# Altium PCB sensores.PcbDoc
Units mm, origin at the board's own origin, x right, y up, seen from the top; angles counter-clockwise.
Board outline 120 x 53 mm, 2 copper layers (Top Layer, Bottom Layer); 22 components, 30 nets, 71 pads, 6 vias.
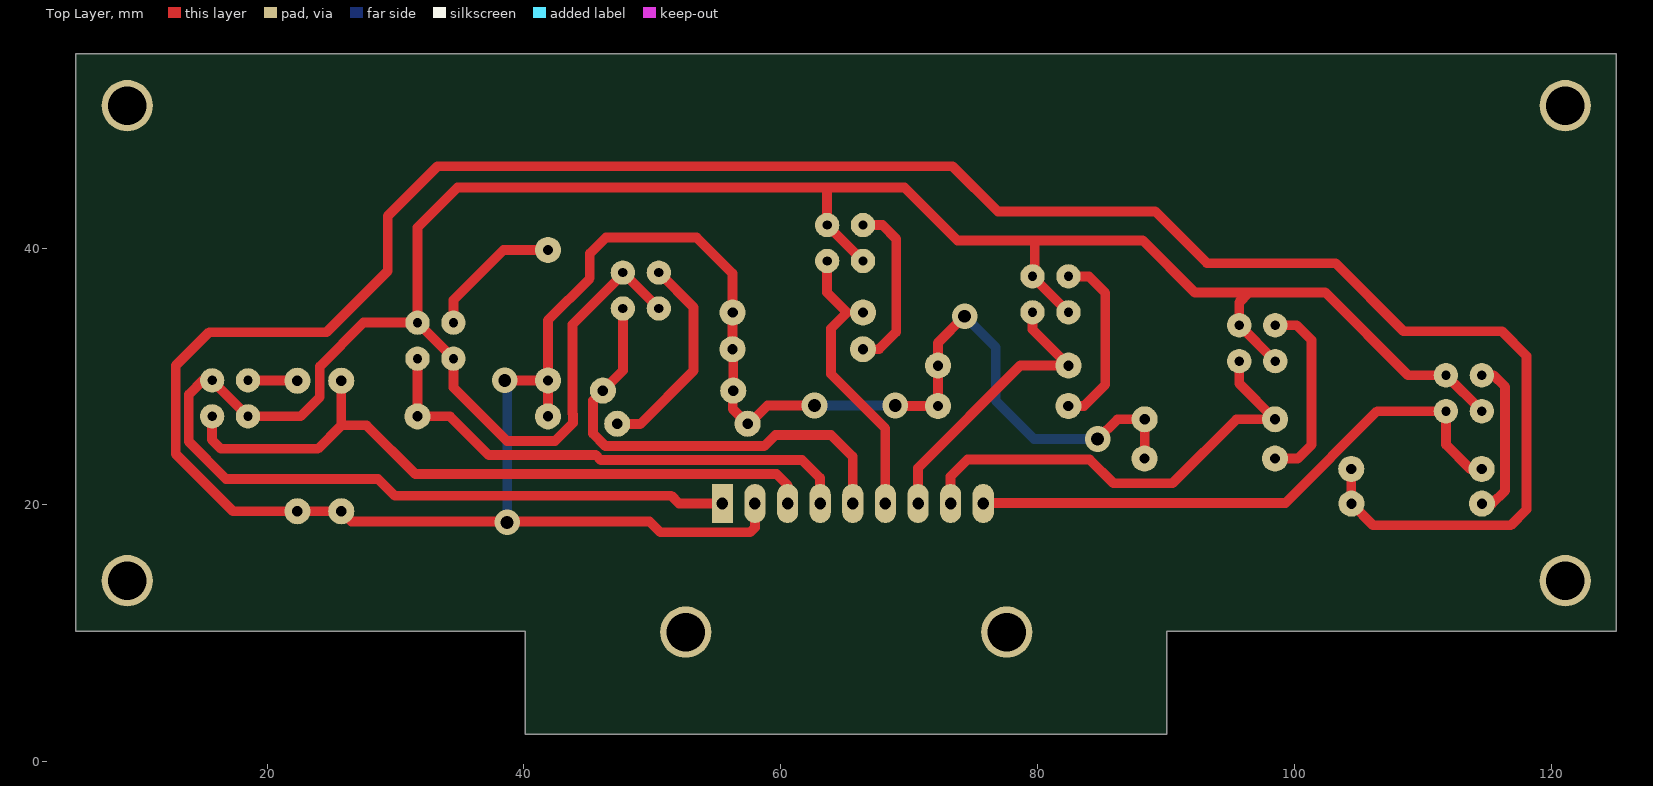
[diagram p0: Top Layer view]
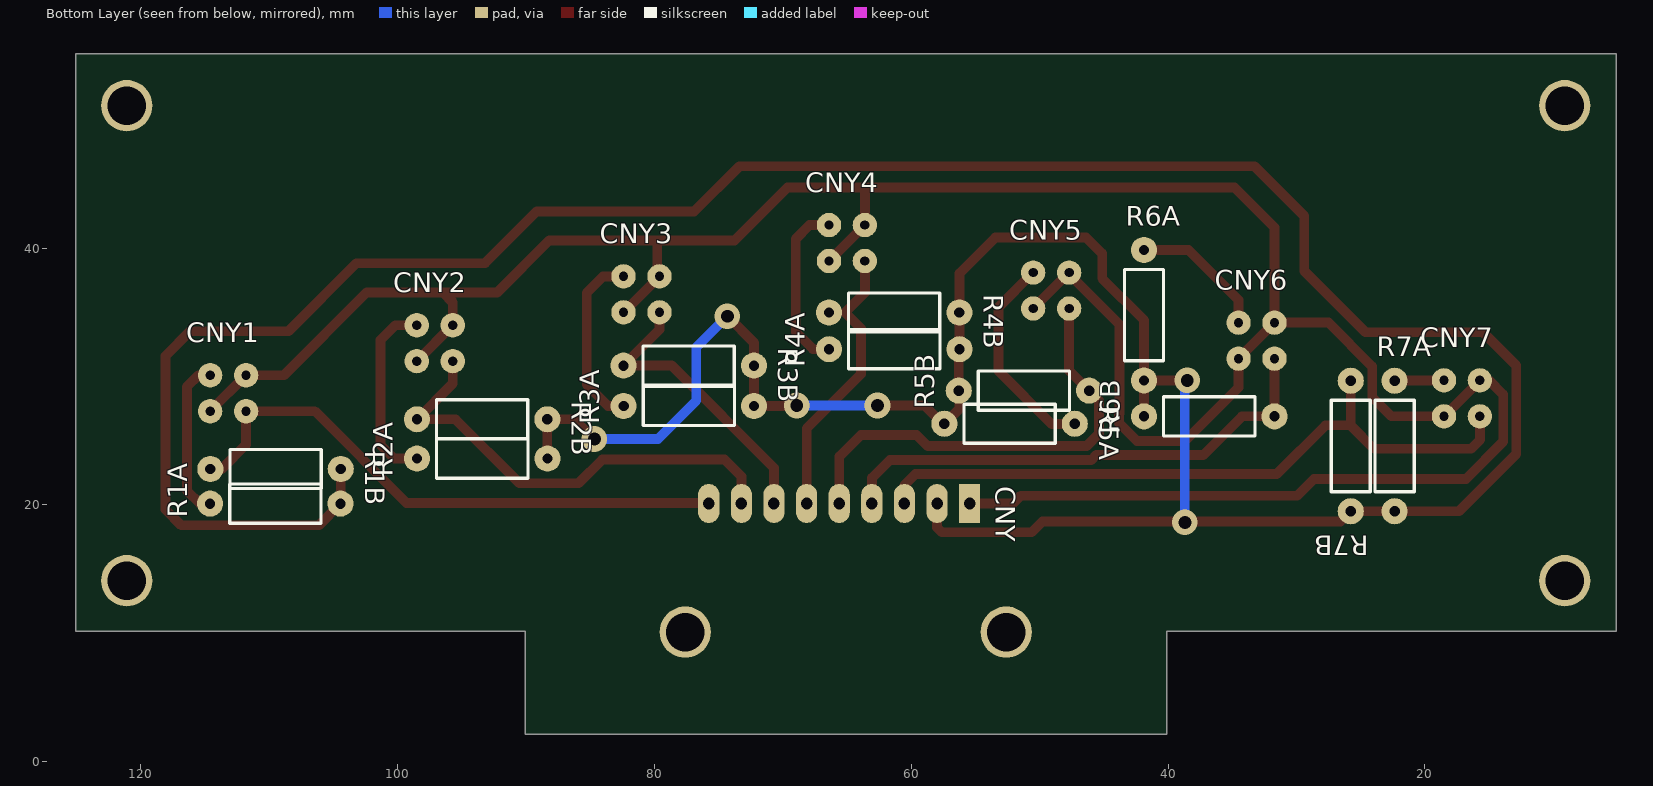
[diagram p1: Bottom Layer view, seen from below]
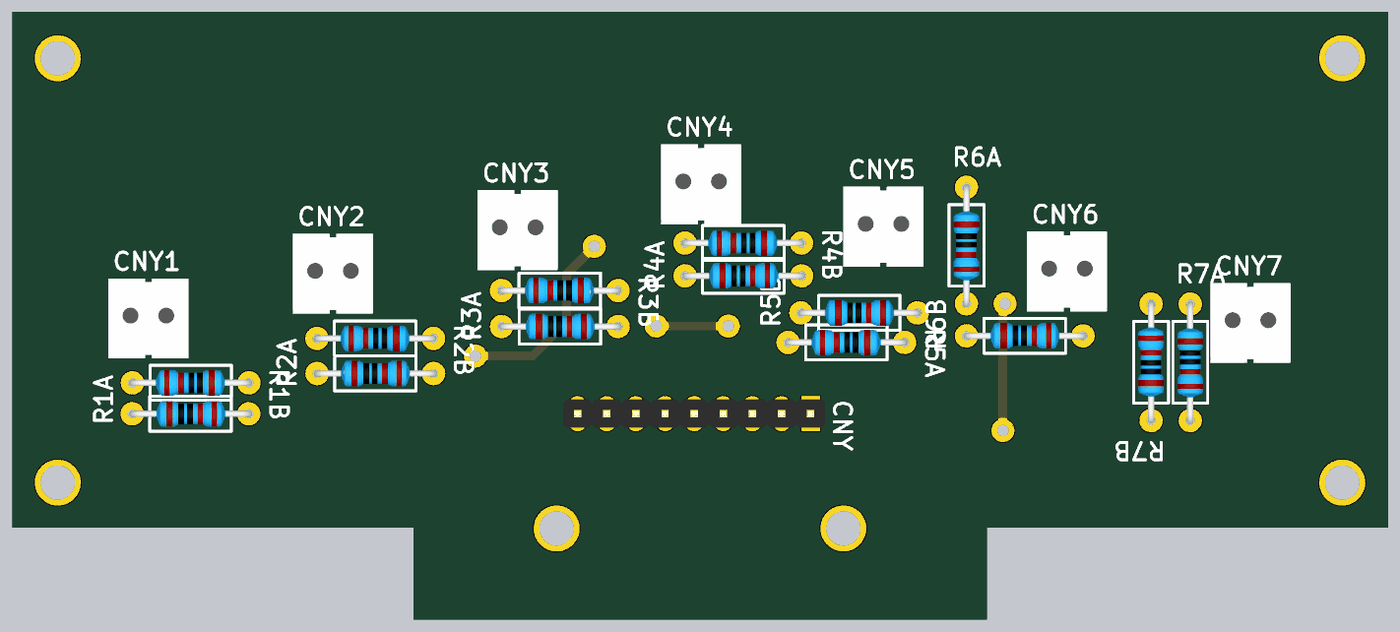
[diagram p2: 3D render of the assembled board from below, using the file's embedded part models]

## Layer stack, top to bottom
Top Solder: solder mask 0.0102, Solder Resist, Dk 3.5
Top Layer: signal copper 0.0356
Dielectric 1: dielectric 0.32, FR-4, Dk 4.8
Bottom Layer: signal copper 0.0356
Bottom Solder: solder mask 0.0102, Solder Resist, Dk 3.5

## Board outline
5.08,10.15 40.08,10.15 40.08,2.15 90.08,2.15 90.08,10.15 125.08,10.15 125.08,55.15 5.08,55.15

## Design rules (kind name [scope] priority, off if disabled: settings)
Clearance [All] p1: gap=0.254
PolygonConnect [All] p1: connectstyle=Relief reliefconductorwidth=0.254 reliefentries=4 polygonreliefangle="90 Angle" airgapwidth=0.254
RoutingVias [All] p1: holewidth=0.711 width=1.27 viastyle="Through Hole" minholewidth=0.711 minwidth=1.27 maxholewidth=0.711 maxwidth=1.27
SolderMaskExpansion [All] p1: expansion=0.102
Width [All] p1: maxlimit=0.762 minlimit=0.762 preferedwidth=0.762
30 further rules are at their usual default settings.

## Components (designator, comment, footprint, x,y, rotation, side; value= is the part's Value field where it differs from the comment)
CNY "" "HEADER 1x9" 55.45,20.11 r270 bottom
CNY1 "CNY70" CNY70 112.906,29.4 r180 bottom
CNY2 "CNY70" CNY70 96.806,33.3 r180 bottom
CNY3 "CNY70" CNY70 80.706,37.1 r180 bottom
CNY4 "CNY70" CNY70 64.706,41.1 r180 bottom
CNY5 "CNY70" CNY70 48.806,37.4 r180 bottom
CNY6 "CNY70" CNY70 32.806,33.5 r180 bottom
CNY7 "CNY70" CNY70 16.806,29 r180 bottom
R1A "" RES-Axial-400mil 104.446,20.1 r0 bottom
R1B "" RES-Axial-400mil 114.59,22.8 r180 bottom
R2A "" RES-Axial-400mil 88.33,23.61 r0 bottom
R2B "" RES-Axial-400mil 98.5,26.67 r180 bottom
R3A "" RES-Axial-400mil 72.24,27.71 r0 bottom
R3B "" RES-Axial-400mil 82.41,30.85 r180 bottom
R4A "" RES-Axial-400mil 56.24,32.13 r0 bottom
R4B "" RES-Axial-400mil 66.41,34.99 r180 bottom
R5A "" RES-Axial-400mil 57.42,26.32 r180 bottom
R5B "" RES-Axial-400mil 46.14,28.9 r0 bottom
R6A "" RES-Axial-400mil 41.87,29.7 r90 bottom
R6B "" RES-Axial-400mil 31.706,26.9 r0 bottom
R7A "" RES-Axial-400mil 22.35,19.51 r90 bottom
R7B "" RES-Axial-400mil 25.77,29.67 r270 bottom

## Footprints (in the part's own frame and the unit in brackets; to place one, negate y for a bottom-side part, rotate by r counter-clockwise, add the part's x,y. Pads: shape width x height; smd on the part's side, far side on the other; paste and mask are expansions set on the pad)
CNY70 [mm]
  round 1.9 hole 0.73: A(-1.7,0.7) C(1.1,-2.1) E(1.1,0.7) K(-1.7,-2.1)
  body extent -3.8,-4.47 3.2,2.5, height 6
"HEADER 1x9" [mil]
  rect 120x65 hole 35.43: 1(0,0)
  oval 120x65 hole 35.43: 2(0,-100) 3(0,-200) 4(0,-300) 5(0,-400) 6(0,-500) 7(0,-600) 8(0,-700) 9(0,-800)
  body extent -49,-850 49,50, height 336
RES-Axial-400mil [mil]
  round 80 hole 31.5: 1(0,0) 2(400,0)
  silkscreen extent 60,-60 340,60, body extent -12,-44 410,44, height 94

## Part data
CNY: library part "Header 1x9"
R1A R1B R2A R2B R3A R3B R4A R4B R5A R5B R6A R6B R7A R7B: library part RES

## Free pads (board coordinates)
  round 4 hole 3: 0(9.1,51.1) 1(121.1,51.1) 2(121.1,14.1) 3(9.1,14.1) 4(52.6,10.1) 5(77.6,10.1)

## Via types
v1: diameter 2, hole 1, Top Layer to Bottom Layer, 6 vias

## Nets (pads, with @x,y where several pads share a name; then routed paths per layer and width w, separated by ;. In a path a pad name is that pad's centre, name@x,y a point inside that pad or via, vN(x,y) a via of type N, cw(c..) or ccw(c..) an arc to the next point about the centre after c; other vN are vias at no path point)
BAT: 
BTN0: 
BTN1: 
CNY1: CNY1.C CNY.9 R1B.1 | length 45.3
  Top Layer w0.762: CNY.9@75.76,20.4 76.01,20.15 99.3,20.15 106.45,27.3 CNY1.C 111.806,24.694 113.7,22.8 R1B.1
CNY2: CNY2.C CNY.8 R2B.1 | length 36.2
  Top Layer w0.762: CNY.8@73.22,20.4 73.22,22.22 74.55,23.55 84.06,23.55 85.92,21.69 90.52,21.69 95.5,26.67 R2B.1 95.706,29.464 CNY2.C
CNY3: CNY3.C CNY.7 R3B.1 | length 22.8
  Top Layer w0.762: CNY.7@70.68,20.4 70.68,22.88 78.65,30.85 R3B.1 79.606,33.654 CNY3.C
CNY4: CNY4.C CNY.6 R4B.1 | length 21.5
  Top Layer w0.762: CNY4.C 63.606,36.554 65.17,34.99 63.92,33.74 63.92,30.19 68.14,25.97 CNY.6@68.14,20.4
CNY5: CNY5.C CNY.5 R5B.1 | length 35.8
  Top Layer w0.762: CNY5.C 47.706,30.466 R5B.1 45.37,28.13 45.37,25.55 46.33,24.59 58.72,24.59 59.58,25.45 63.92,25.45 65.6,23.77 CNY.5@65.6,20.4
CNY6: CNY6.C CNY.4 R6B.1 | length 39.5
  Top Layer w0.762: CNY6.C R6B.1 34.24,26.9 37.25,23.89 45.593,23.89 45.973,23.51 61.66,23.51 63.06,22.11 CNY.4@63.06,20.4
CNY7: CNY7.C CNY.3 R7B.1 | length 54.5
  Top Layer w0.762: CNY7.C 15.706,25.074 16.41,24.37 23.94,24.37 25.77,26.2 ; R7B.1 25.77,26.2 ; CNY.3 60.53,21.54 59.67,22.4 31.53,22.4 27.73,26.2 25.77,26.2
GND: CNY1.E CNY1.K CNY2.E CNY2.K CNY3.E CNY3.K CNY4.E CNY4.K CNY5.E CNY5.K CNY6.E CNY6.K CNY7.E CNY7.K CNY.1 | length 225.6
  Top Layer w0.762: CNY5.K CNY5.E 47.706,37.986 43.78,34.06 43.78,27.103 43.811,27.071 43.811,26.371 42.42,24.98 38.68,24.98 34.506,29.154 CNY6.K CNY6.E ; CNY.1 52.08,20.11 51.47,20.72 29.93,20.72 28.63,22.02 16.8,22.02 13.896,24.924 13.896,28.616 14.98,29.7 CNY7.E CNY7.K 22.61,26.9 24.1,28.39 24.1,30.79 27.51,34.2 CNY6.E ; CNY4.K CNY4.E 63.606,44.624 63.51,44.72 ; CNY3.K CNY3.E 79.78,37.974 79.78,40.59 ; CNY2.K CNY2.E 95.706,35.786 96.47,36.55 ; CNY1.K CNY1.E 108.86,30.1 102.41,36.55 96.47,36.55 ; CNY6.E 31.706,41.606 34.82,44.72 63.51,44.72 ; 63.51,44.72 69.63,44.72 73.76,40.59 79.78,40.59 ; 79.78,40.59 88.2,40.59 92.24,36.55 96.47,36.55
LED0: 
LED1: 
M_A: 
M_B: 
M_PWM: 
NetCNY1_A: CNY1.A R1A.2 | length 12.5
  Top Layer w0.762: R1A.2 115.4,20.1 116.4,21.1 116.4,29.21 115.51,30.1 CNY1.A
NetCNY2_A: CNY2.A R2A.2 | length 14.8
  Top Layer w0.762: R2A.2 100.27,23.61 101.34,24.68 101.34,32.84 100.18,34 CNY2.A
NetCNY3_A: CNY3.A R3A.2 | length 14.1
  Top Layer w0.762: R3A.2 83.61,27.71 85.28,29.38 85.28,36.52 84,37.8 CNY3.A
NetCNY4_A: CNY4.A R4A.2 | length 13.4
  Top Layer w0.762: R4A.2 67.64,32.13 68.99,33.48 68.99,40.73 67.92,41.8 CNY4.A
NetCNY5_A: CNY5.A R5A.2 | length 16.7
  Top Layer w0.762: R5A.2@47.26,25.75 47.81,26.3 49.06,26.3 53.21,30.45 53.21,35.396 CNY5.A
NetCNY6_A: CNY6.A R6A.2 | length 10.7
  Top Layer w0.762: CNY6.A 34.506,35.966 38.4,39.86 R6A.2
NetCNY7_A: CNY7.A R7A.2 | length 3.9
  Top Layer w0.762: CNY7.A 22.32,29.7 R7A.2
NetD0_A: 
NetD1_A: 
NetL293_3: 
NetL293_11: 
SPWM: 
VCC: CNY.2 R1A.1 R1B.2 R2A.1 R2B.2 R3A.1 R3B.2 R4A.1 R4B.2 R5A.1 R5B.2 R6A.1 R6B.2 R7A.1 R7B.2 | length 307.6
  Top Layer w0.762: v1(38.5,29.7) R6A.1 ; v1(38.69,18.64) 38.58,18.64 v1@38.5,18.72 ; R6B.2 41.87,26.904 R6A.1 ; CNY.2 57.99,18.25 57.61,17.87 50.62,17.87 49.77,18.72 v1@38.5,18.72 ; v1(62.63,27.75) 58.96,27.75 57.53,26.32 R5A.1 56.26,27.48 56.26,28.86 R5B.2 56.3,32.07 R4A.1 56.25,32.14 R4B.2 56.25,38.04 53.45,40.84 46.39,40.84 45.13,39.58 45.13,37.65 41.87,34.39 R6A.1 ; v1(68.92,27.75) 68.96,27.71 R3A.1 72.25,27.72 R3B.2 72.25,32.63 v1(74.32,34.7) ; v1(84.68,25.14) 86.21,26.67 R2B.2 88.34,23.62 R2A.1 ; R1B.2 104.43,20.116 R1A.1 106.126,18.42 116.86,18.42 118.09,19.65 118.09,31.61 116.17,33.53 108.51,33.53 103.21,38.83 93.19,38.83 89.17,42.85 76.91,42.85 73.38,46.38 33.27,46.38 29.39,42.5 29.39,38.21 24.63,33.45 15.48,33.45 12.88,30.85 12.88,23.97 17.34,19.51 R7A.1 R7B.2 26.56,18.72 v1@38.5,18.72
  Bottom Layer w0.762: v1(38.5,29.7) 38.38,29.58 38.69,29.27 v1(38.69,18.64) ; v1(62.63,27.75) v1(68.92,27.75) ; v1(74.32,34.7) 76.75,32.27 76.75,28.11 79.72,25.14 v1(84.68,25.14)
VSERVO: 

## Silkscreen, mask and mechanical layers (free items; w line width, h text height)
Mechanical 1:
  lines w0.254: 5.08,10.15 5.08,55.15 125.08,55.15 125.08,10.15 90.08,10.15 90.08,2.16 90.07,2.15 40.08,2.15 40.08,10.15 5.08,10.15